# Altium PCB PCB1.PcbDoc
Units mil, origin at the board's own origin, x right, y up, seen from the top; angles counter-clockwise.
Board outline 4330.71 x 4370.08 mil, 2 copper layers (Top Layer, Bottom Layer); 7 components, 30 nets, 60 pads, 25 vias.
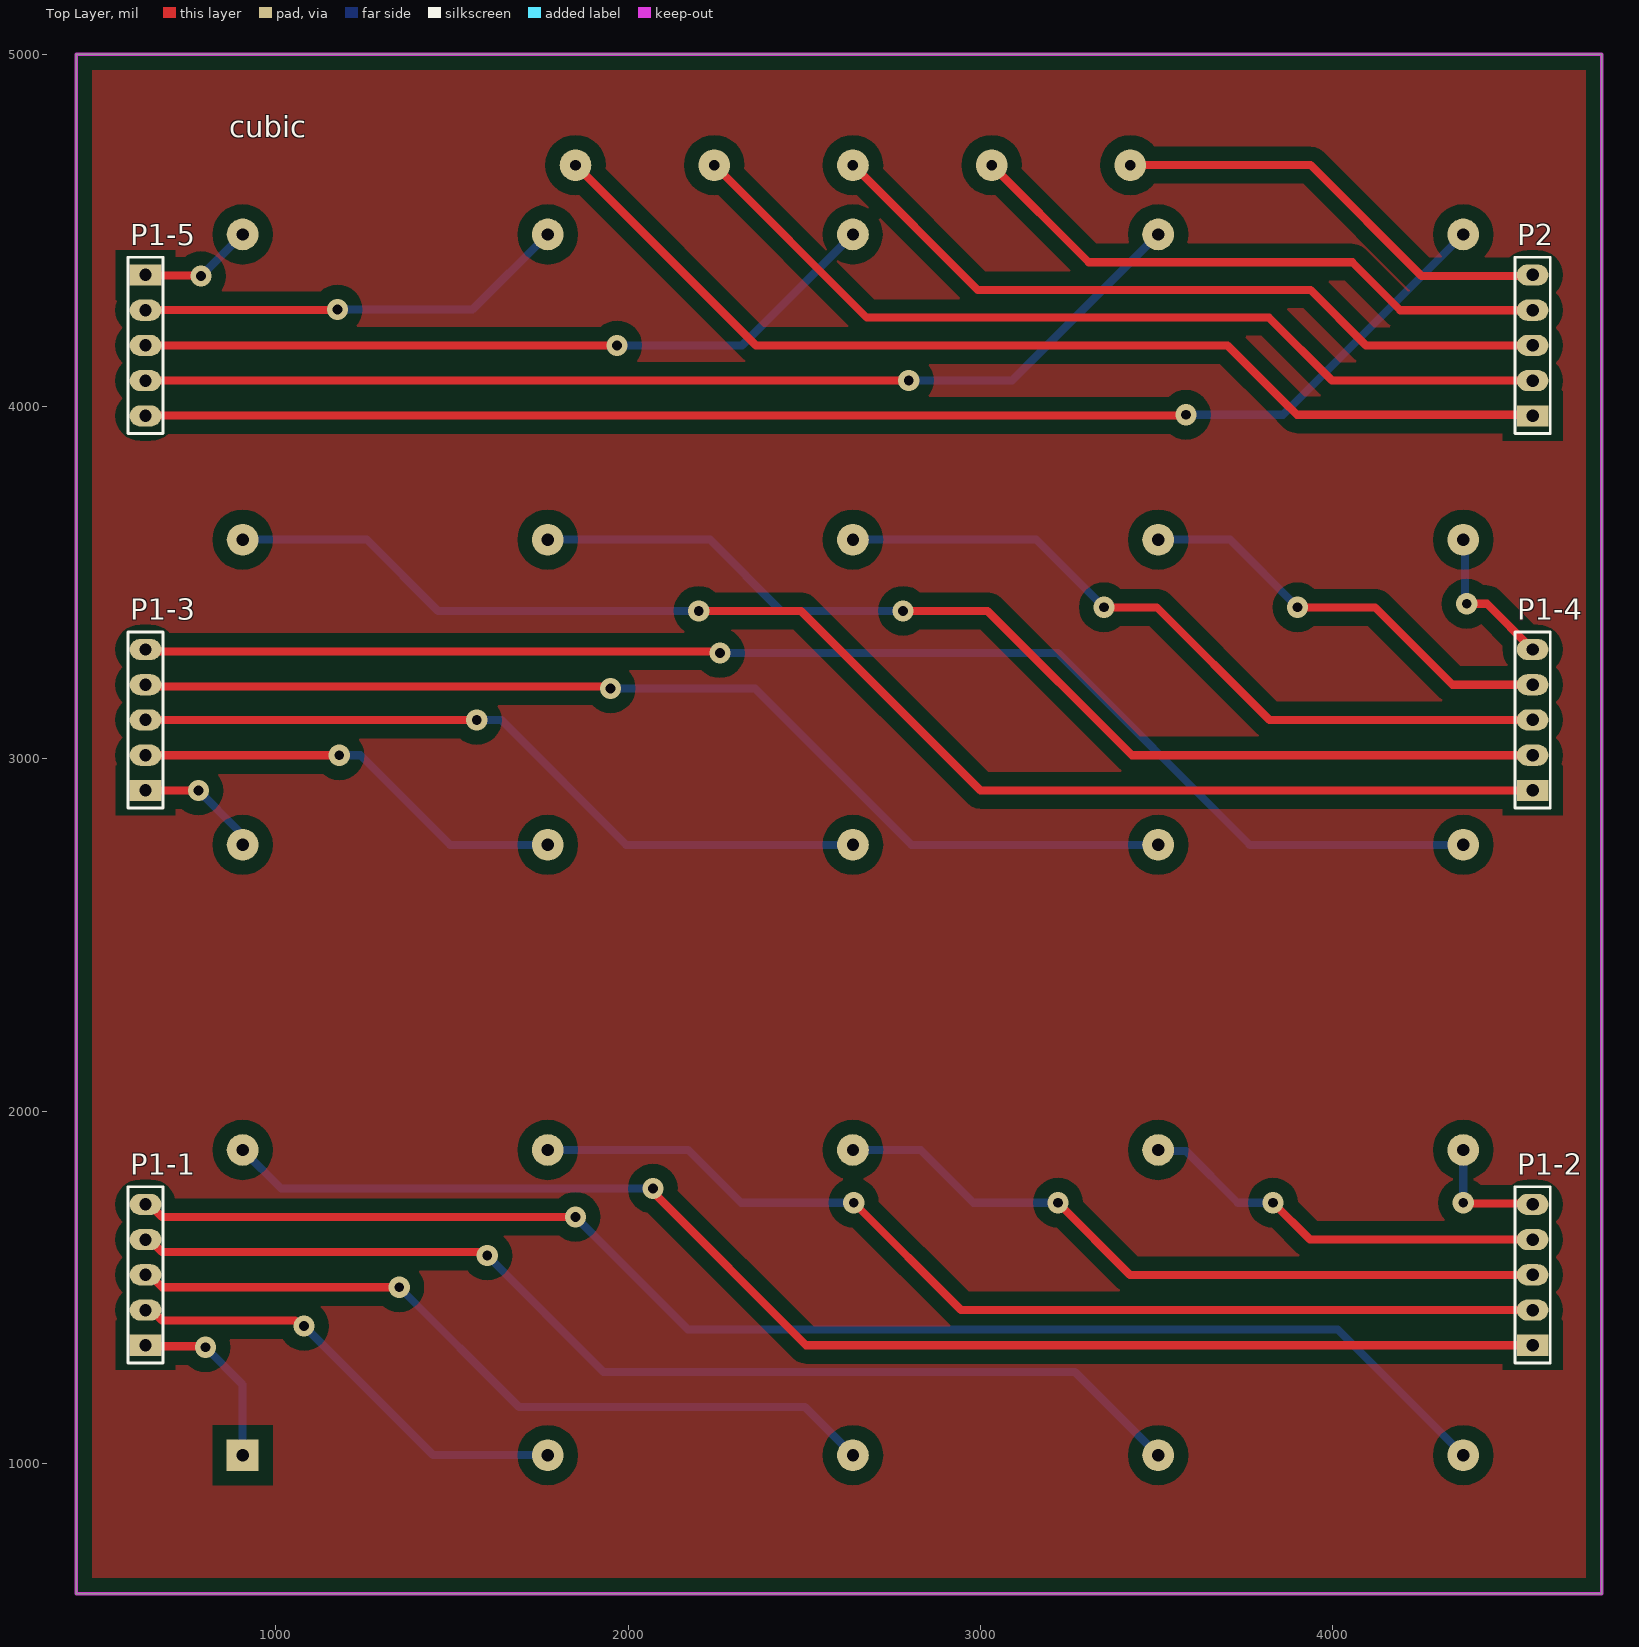
[diagram p0: Top Layer view]
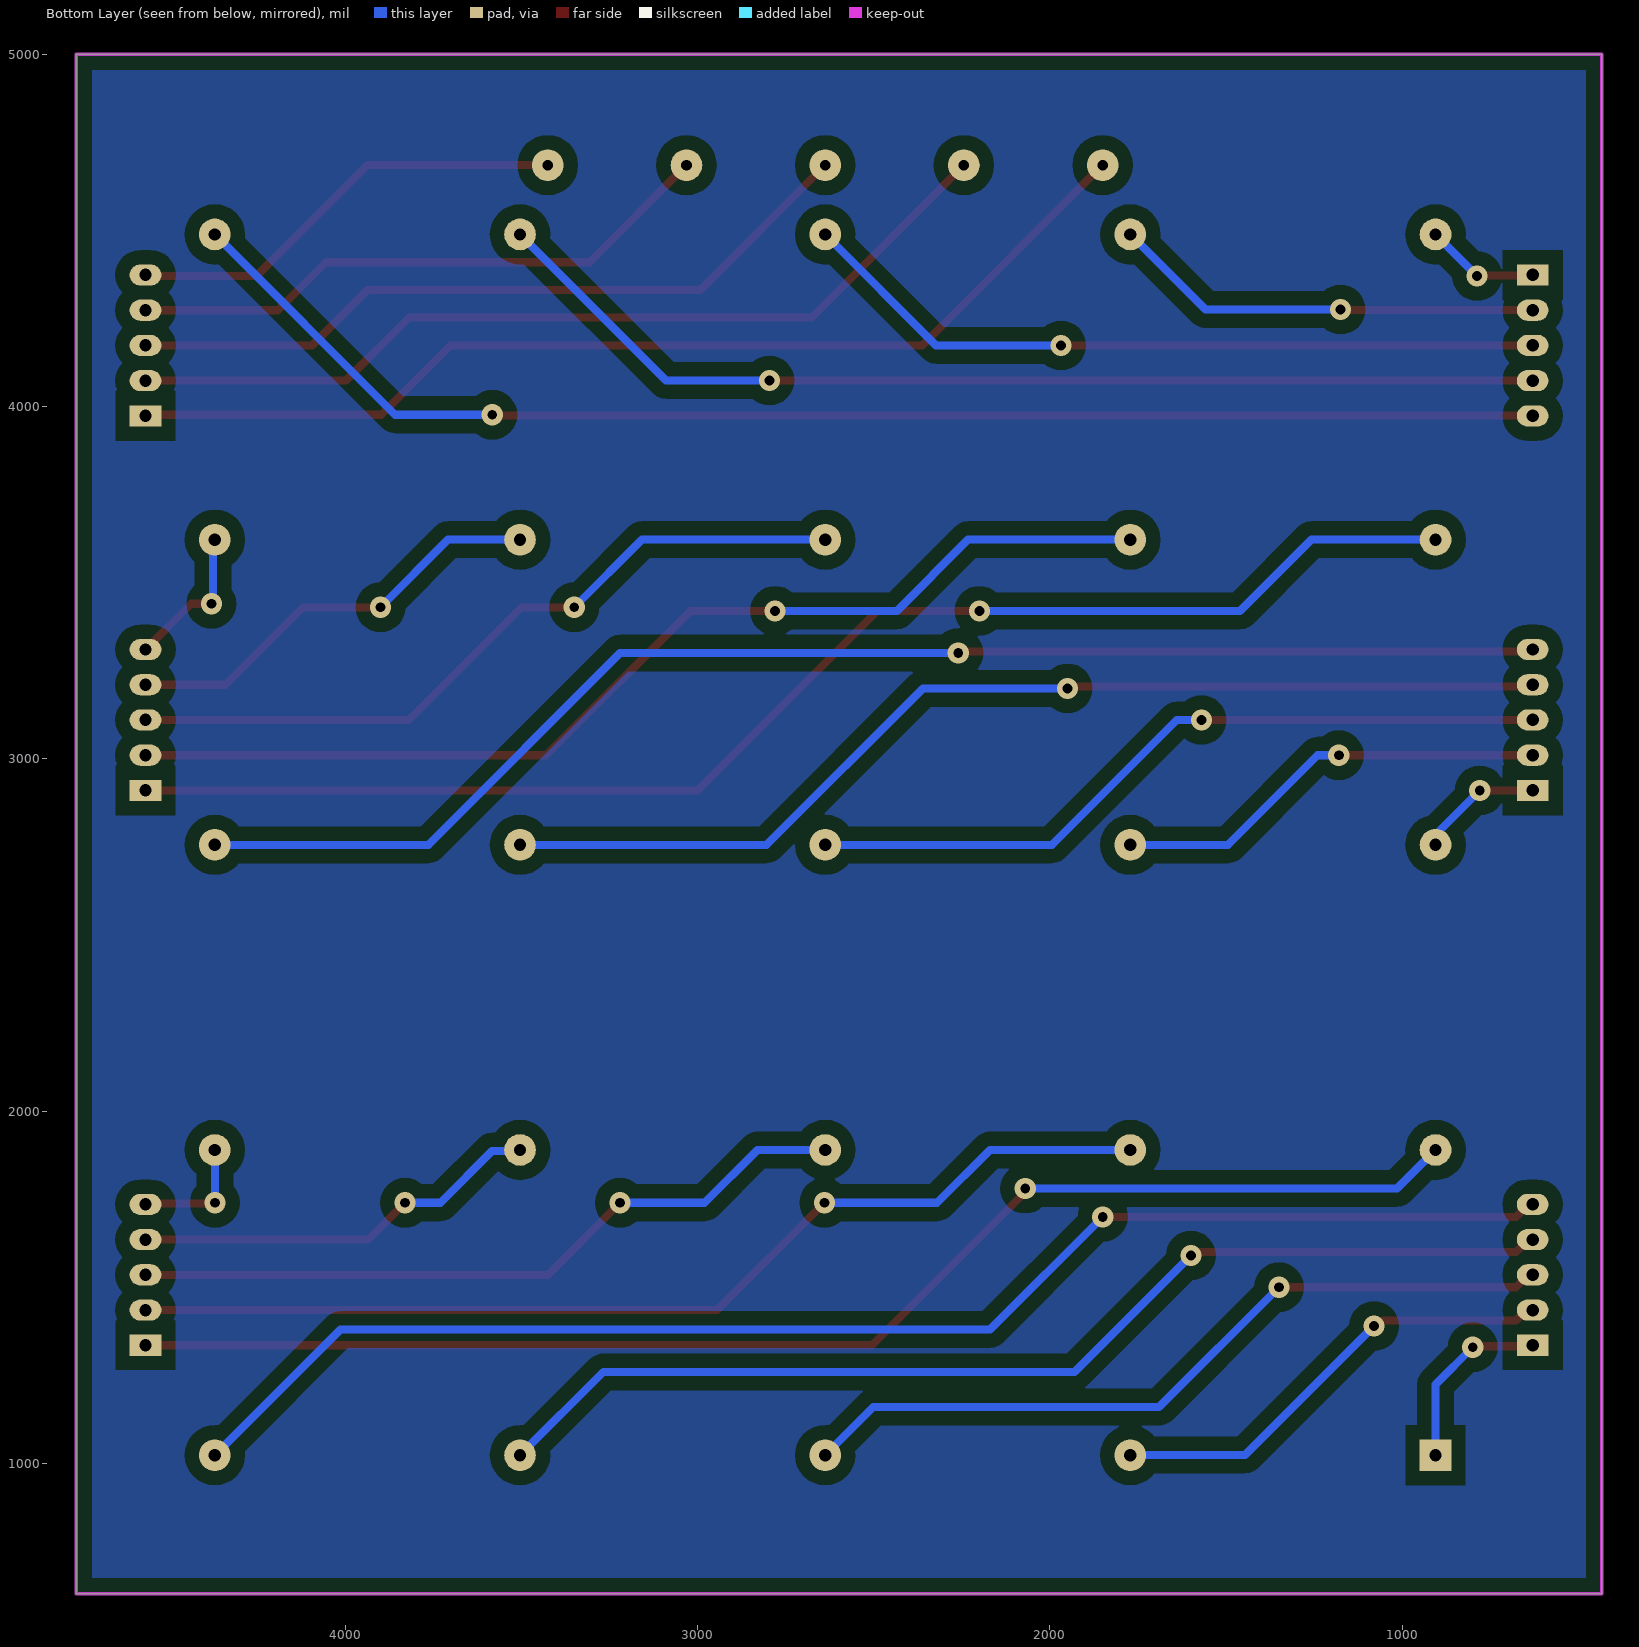
[diagram p1: Bottom Layer view, seen from below]

## Layer stack, top to bottom
Top Solder: solder mask 0.4, Solder Resist, Dk 3.5
Top Layer: signal copper 1.4
Dielectric 1: dielectric 12.6, FR-4, Dk 4.8
Bottom Layer: signal copper 1.4
Bottom Solder: solder mask 0.4, Solder Resist, Dk 3.5

## Board outline
433.07,629.92 433.07,5000 4763.78,5000 4763.78,629.92

## Design rules (kind name [scope] priority, off if disabled: settings)
Clearance poly [InPolygon] p1: gap=40 ignorepadtopadclearanceinfootprint=FALSE
Clearance [All] p2: gap=10 ignorepadtopadclearanceinfootprint=FALSE except(0: Arc-Hole Track-Hole SMDPad-Hole THPad-Hole Via-Hole Fill-Hole Poly-Hole Region-Hole Text-Hole)
PolygonConnect [All] p1: connectstyle=Relief reliefconductorwidth=10 reliefentries=4 polygonreliefangle="90 Angle" airgapwidth=10
RoutingVias [All] p1: holewidth=28 width=50 viastyle="Through Hole" minholewidth=28 minwidth=50 maxholewidth=28 maxwidth=50
SolderMaskExpansion [All] p1: expansion=4
Width Width_VCC [InNet('VCC')] p1: maxlimit=35 minlimit=30 preferedwidth=33 minimp=50.000000 maximp=50.000000 favimp=50.000000
Width Width_GND [InNet('GND')] p2: maxlimit=35 minlimit=30 preferedwidth=33 minimp=50.000000 maximp=50.000000 favimp=50.000000
Width Width_1 [All] p3: maxlimit=25 minlimit=21 preferedwidth=23 minimp=50.000000 maximp=50.000000 favimp=50.000000
30 further rules are at their usual default settings.

## Components (designator, comment, footprint, x,y, rotation, side; value= is the part's Value field where it differs from the comment)
cubic "5*5*5_LED" PCBComponent_1 905.51,1023.62 r0 top
P1-1 "Header 5" HDR1X5 629.92,1335.43 r90 top
P1-2 "Header 5" HDR1X5 4566.93,1335.43 r90 top
P1-3 "Header 5" HDR1X5 629.92,2910.24 r90 top
P1-4 "Header 5" HDR1X5 4566.93,2910.24 r90 top
P1-5 "Header 5" HDR1X5 629.92,4373.23 r270 top
P2 "Header 5" HDR1X5 4566.93,3973.23 r90 top

## Footprints (in the part's own frame and the unit in brackets; to place one, negate y for a bottom-side part, rotate by r counter-clockwise, add the part's x,y. Pads: shape width x height; smd on the part's side, far side on the other; paste and mask are expansions set on the pad)
HDR1X5 [mil] "Connector; Header; 5 Position"
  rect 60x90 hole 35.43: 1(0,0)
  oval 60x90 hole 35.43: 2(100,0) 3(200,0) 4(300,0) 5(400,0)
  silkscreen extent -50,-50 450,50
PCBComponent_1 [mil]
  rect 90x90 hole 35: 1(0,0)
  round 90 hole 35: 2(866.14,0) 3(1732.28,0) 4(2598.43,0) 5(3464.57,0) 6(0,866.14) 7(866.14,866.14) 8(1732.28,866.14) 9(2598.43,866.14) 10(3464.57,866.14) 11(0,1732.28) 12(866.14,1732.28) 13(1732.28,1732.28) 14(2598.43,1732.28) 15(3464.57,1732.28) 16(0,2598.43) 17(866.14,2598.43) 18(1732.28,2598.43) 19(2598.43,2598.43) 20(3464.57,2598.43) 21(0,3464.57) 22(866.14,3464.57) 23(1732.28,3464.57) 24(2598.43,3464.57) 25(3464.57,3464.57)
  round 90 hole 30: 26(944.88,3661.42) 27(1338.58,3661.42) 28(1732.28,3661.42) 29(2125.98,3661.42) 30(2519.68,3661.42)

## Part data
P1-1 P1-2 P1-3 P1-4 P1-5 P2: "Header, 5-Pin", LatestRevisionDate=17-Jul-2002, LatestRevisionNote="Re-released for DXP Platform.", Publisher="Altium Limited"

## Via types
v1: diameter 60, hole 28, Top Layer to Bottom Layer, 25 vias

## Nets (pads, with @x,y where several pads share a name; then routed paths per layer and width w, separated by ;. In a path a pad name is that pad's centre, name@x,y a point inside that pad or via, vN(x,y) a via of type N, cw(c..) or ccw(c..) an arc to the next point about the centre after c; other vN are vias at no path point)
Netcubic_1: cubic.1 P1-1.1 | length 522.4
  Top Layer w23: P1-1.1 632.64,1332.72 797.28,1332.72 v1(800,1330)
  Bottom Layer w23: v1(800,1330) 905.51,1224.49 cubic.1
Netcubic_2: cubic.2 P1-1.2 | length 1312.3
  Top Layer w23: P1-1.2 646.79,1435.43 676.89,1405.32 1054.66,1405.32 1069.99,1390 v1(1080,1390)
  Bottom Layer w23: v1(1080,1390) 1446.38,1023.62 cubic.2
Netcubic_3: cubic.3 P1-1.3 | length 2219.9
  Top Layer w23: P1-1.3 641.46,1535.43 676.89,1500 v1(1350,1500)
  Bottom Layer w23: v1(1350,1500) 1690,1160 2501.42,1160 cubic.3
Netcubic_4: cubic.4 P1-1.4 | length 3127.4
  Top Layer w23: P1-1.4 641.46,1635.43 676.89,1600 1579.99,1600 1589.99,1590 v1(1600,1590)
  Bottom Layer w23: v1(1600,1590) 1930,1260 3267.56,1260 cubic.4
Netcubic_5: cubic.5 P1-1.5 | length 4035
  Top Layer w23: P1-1.5 641.46,1735.43 676.89,1700 v1(1850,1700)
  Bottom Layer w23: v1(1850,1700) 2170,1380 4013.7,1380 cubic.5
Netcubic_6: cubic.6 P1-2.1 | length 3896.9
  Top Layer w23: v1(2070,1780) 2070,1770 2504.57,1335.43 P1-2.1
  Bottom Layer w23: cubic.6 1015.28,1780 v1(2070,1780)
Netcubic_7: cubic.7 P1-2.2 | length 2983.5
  Top Layer w23: v1(2640,1740) 2944.57,1435.43 P1-2.2
  Bottom Layer w23: cubic.7 2170.24,1889.76 2320,1740 v1(2640,1740)
Netcubic_8: cubic.8 P1-2.3 | length 2075.9
  Top Layer w23: v1(3220,1740) 3424.57,1535.43 P1-2.3
  Bottom Layer w23: cubic.8 2830.24,1889.76 2980,1740 v1(3220,1740)
Netcubic_9: cubic.9 P1-2.4 | length 1168.3
  Top Layer w23: v1(3830,1740) 3934.57,1635.43 P1-2.4
  Bottom Layer w23: cubic.9 3507.14,1886.56 3583.44,1886.56 3730,1740 v1(3830,1740)
Netcubic_10: cubic.10 P1-2.5 | length 348.6
  Top Layer w23: v1(4370,1740) 4372.28,1737.72 4564.65,1737.72 P1-2.5
  Bottom Layer w23: v1(4370,1740) v1(4370,1740) 4370.04,1889.72 cubic.10
Netcubic_11: cubic.11 P1-3.1 | length 356.3
  Top Layer w23: P1-3.1 630.04,2910.12 779.88,2910.12 v1(780,2910)
  Bottom Layer w23: v1(780,2910) 892.69,2797.31 892.69,2768.73 cubic.11
Netcubic_12: cubic.12 P1-3.2 | length 1247.1
  Top Layer w23: P1-3.2 630.04,3010.12 1179.88,3010.12 v1(1180,3010)
  Bottom Layer w23: v1(1180,3010) 1240,3010 1494.09,2755.91 cubic.12
Netcubic_13: cubic.13 P1-3.3 | length 2154.6
  Top Layer w23: P1-3.3 630.04,3110.12 1569.88,3110.12 v1(1570,3110)
  Bottom Layer w23: v1(1570,3110) 1640,3110 1994.09,2755.91 cubic.13
Netcubic_14: cubic.14 P1-3.4 | length 3062.2
  Top Layer w23: P1-3.4 635.04,3205.12 1944.88,3205.12 v1(1950,3200)
  Bottom Layer w23: v1(1950,3200) 2360,3200 2804.09,2755.91 cubic.14
Netcubic_15: cubic.15 P1-3.5 | length 3969.8
  Top Layer w23: P1-3.5 635.04,3305.12 2254.88,3305.12 v1(2260,3300)
  Bottom Layer w23: v1(2260,3300) 3220,3300 3764.09,2755.91 cubic.15
Netcubic_16: cubic.16 P1-4.1 | length 3956.3
  Top Layer w23: v1(2200,3420) 2490,3420 2999.76,2910.24 P1-4.1
  Bottom Layer w23: cubic.16 1257.95,3622.05 1460,3420 v1(2200,3420)
Netcubic_17: cubic.17 P1-4.2 | length 3048.7
  Top Layer w23: v1(2780,3420) 3020,3420 3429.76,3010.24 P1-4.2
  Bottom Layer w23: cubic.17 2232.05,3622.05 2434.09,3420 v1(2780,3420)
Netcubic_18: cubic.18 P1-4.3 | length 2141.1
  Top Layer w23: v1(3350,3430) 3500,3430 3819.76,3110.24 P1-4.3
  Bottom Layer w23: cubic.18 3157.95,3622.05 v1(3350,3430)
Netcubic_19: cubic.19 P1-4.4 | length 1233.6
  Top Layer w23: v1(3900,3430) 4120,3430 4339.76,3210.24 P1-4.4
  Bottom Layer w23: cubic.19 3707.95,3622.05 v1(3900,3430)
Netcubic_20: cubic.20 P1-4.5 | length 426.8
  Top Layer w23: v1(4380,3440) 4437.17,3440 P1-4.5
  Bottom Layer w23: cubic.20 4375.04,3617.09 4375.04,3444.96 v1(4380,3440)
Netcubic_21: cubic.21 P1-5.1 | length 325.8
  Top Layer w23: P1-5.1 631.5,4371.65 785.83,4371.65 v1(787.4,4370.08)
  Bottom Layer w23: v1(787.4,4370.08) cubic.21
Netcubic_22: cubic.22 P1-5.2 | length 1230.8
  Top Layer w23: P1-5.2 630.81,4274.11 1174.11,4274.11 v1(1175,4275)
  Bottom Layer w23: v1(1175,4275) 1558.46,4275 cubic.22
Netcubic_23: cubic.23 P1-5.3 | length 2138.3
  Top Layer w23: P1-5.3 v1(1968.5,4173.23)
  Bottom Layer w23: v1(1968.5,4173.23) 2322.83,4173.23 cubic.23
Netcubic_24: cubic.24 P1-5.4 | length 3045.9
  Top Layer w23: P1-5.4 630.22,4073.52 2795.96,4073.52 v1(2796.26,4073.82)
  Bottom Layer w23: v1(2796.26,4073.82) 3089.57,4073.82 cubic.24
Netcubic_25: cubic.25 P1-5.5 | length 3953.5
  Top Layer w23: P1-5.5 631.5,3974.8 3581.1,3974.8 v1(3582.68,3976.38)
  Bottom Layer w23: v1(3582.68,3976.38) 3858.27,3976.38 cubic.25
Netcubic_26: cubic.26 P2.1 | length 3011.4
  Top Layer w23: cubic.26 2362.2,4173.23 3700.79,4173.23 3858.27,4015.75 3897.64,3976.38 4563.78,3976.38 P2.1
Netcubic_27: cubic.27 P2.2 | length 2576.3
  Top Layer w23: cubic.27 2677.17,4251.97 3818.9,4251.97 3997.64,4073.23 P2.2
Netcubic_28: cubic.28 P2.3 | length 2141.1
  Top Layer w23: cubic.28 2992.13,4330.71 3937.01,4330.71 4094.49,4173.23 P2.3
Netcubic_29: cubic.29 P2.4 | length 1706
  Top Layer w23: cubic.29 3307.09,4409.45 4055.12,4409.45 4191.34,4273.23 P2.4
Netcubic_30: cubic.30 P2.5 | length 1273.5
  Top Layer w23: cubic.30 3937.01,4685.04 4251.97,4370.08 4563.78,4370.08 P2.5

## Polygon pours and split planes (outlines as drawn)
no net on Top Layer (solid, pour order 0): 433.07,5000 4763.78,5000 4763.78,629.92 433.07,629.92
no net on Bottom Layer (solid, pour order 2): 433.07,5000 4763.78,5000 4763.78,629.92 433.07,629.92

## Keep-outs
Keep-Out Layer:
  the board outline again, w10

## Dimensions
4566.93,1335.43 to 4763.78,629.92 on Top Overlay
4566.93,1335.43 to 4763.78,629.92 on Top Overlay
629.92,4173.23 to 629.92,3110.24 on Top Overlay
629.92,3110.24 to 629.92,1535.43 on Top Overlay
629.92,1335.43 to 4566.93,1335.43 on Top Overlay
433.07,5000 to 433.07,629.92 on Top Overlay
433.07,5000 to 4763.78,5000 on Top Overlay